# Altium PCB Q24brakelightpcb.PcbDoc
Units mil, origin at the board's own origin, x right, y up, seen from the top; angles counter-clockwise.
Board outline 6000 x 4000 mil, 2 copper layers (Top Layer, Bottom Layer); 25 components, 14 nets, 50 pads, 12 vias.
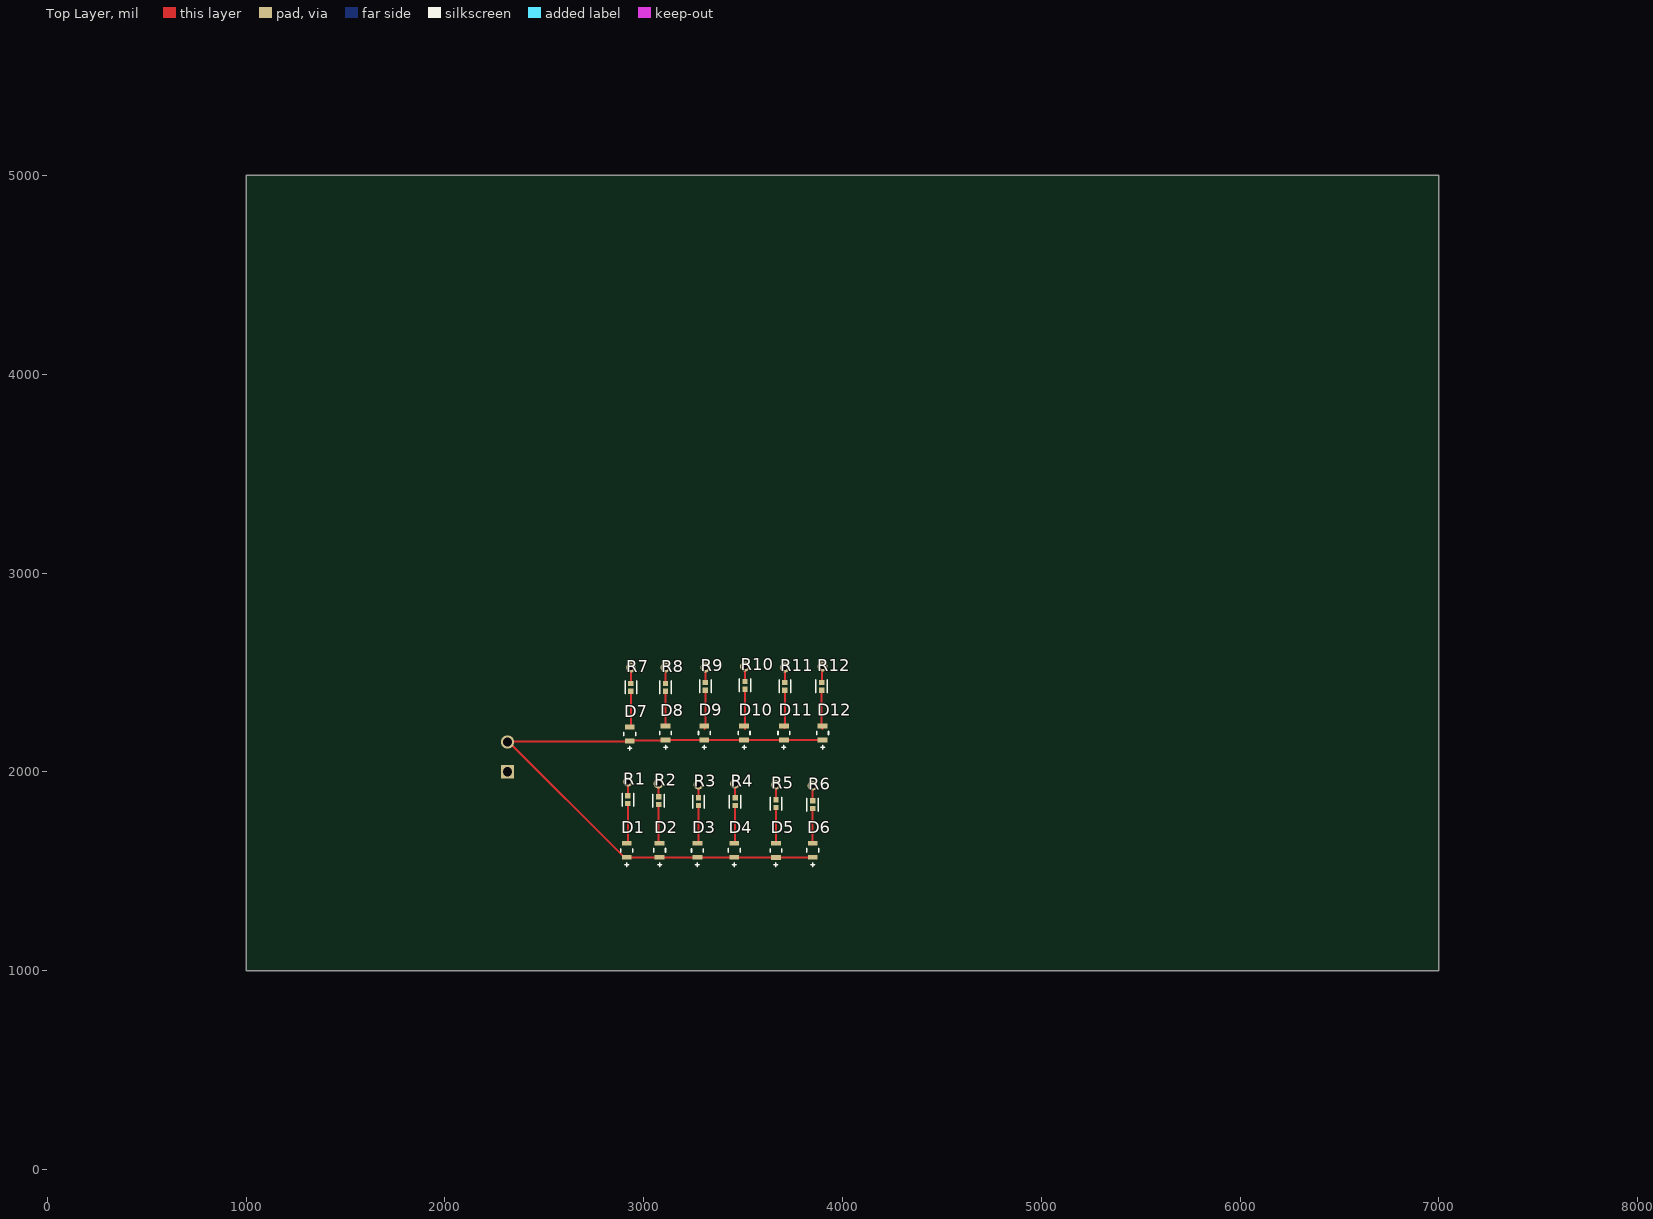
[diagram p0: Top Layer view]
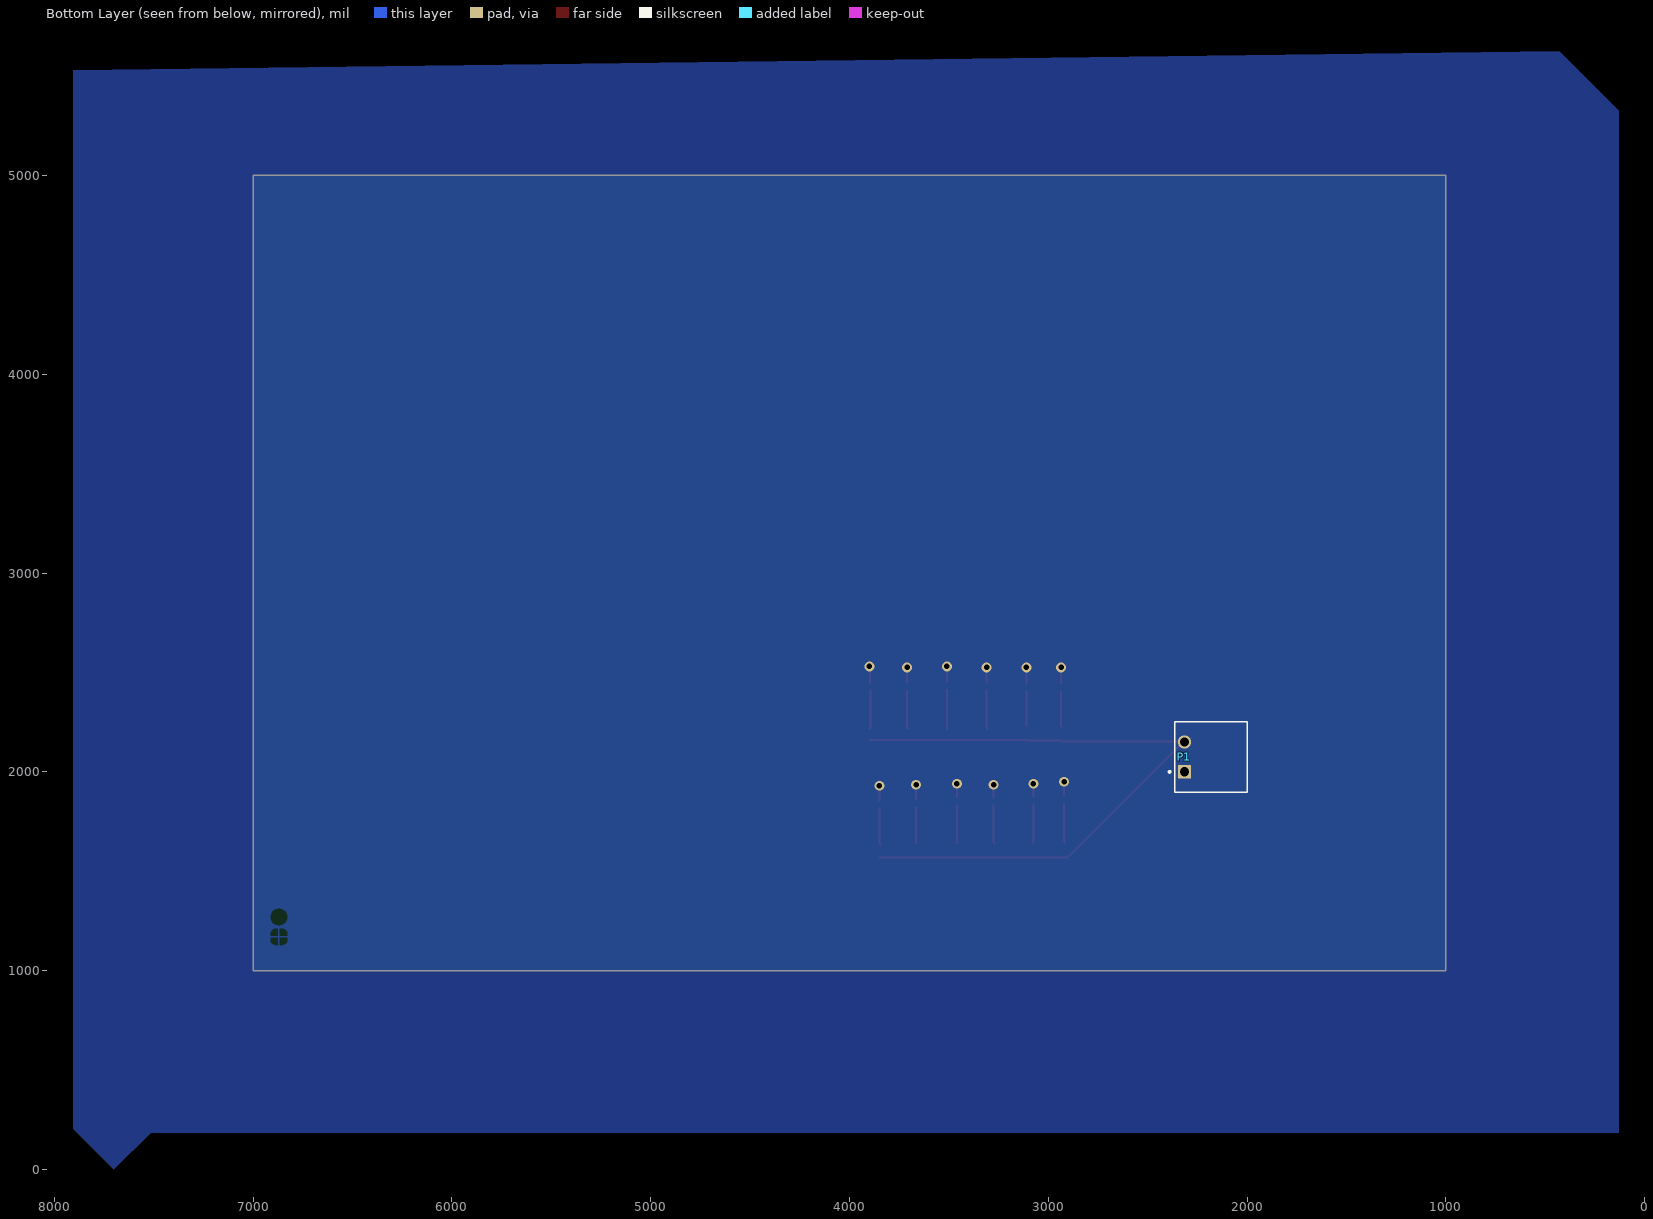
[diagram p1: Bottom Layer view, seen from below]
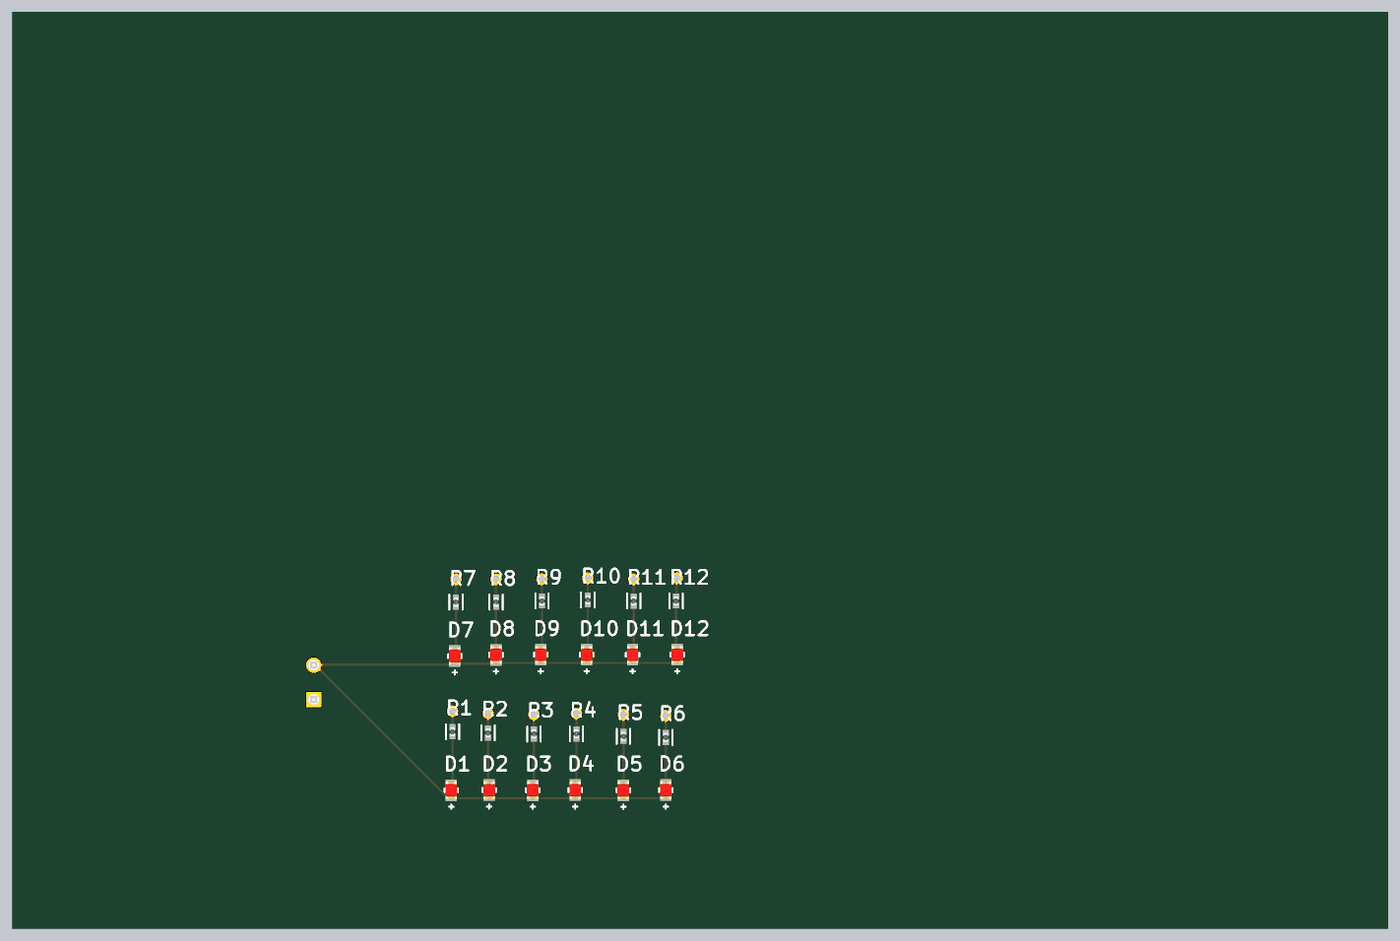
[diagram p2: 3D render of the assembled board from above, using the file's embedded part models]

## Layer stack, top to bottom
Top Solder: solder mask 0.4, Solder Resist, Dk 3.5
Top Layer: signal copper 1.4
Dielectric 1: dielectric 12.6, FR-4, Dk 4.8
Bottom Layer: signal copper 1.4
Bottom Solder: solder mask 0.4, Solder Resist, Dk 3.5

## Board outline
1000,1000 7000,1000 7000,5000 1000,5000

## Design rules (kind name [scope] priority, off if disabled: settings)
Clearance [All] p1: gap=10 ignorepadtopadclearanceinfootprint=FALSE except(0: Arc-Hole Track-Hole SMDPad-Hole THPad-Hole Via-Hole Fill-Hole Poly-Hole Region-Hole Text-Hole)
PolygonConnect [All] p1: connectstyle=Relief reliefconductorwidth=10 reliefentries=4 polygonreliefangle="90 Angle" airgapwidth=10
RoutingVias [All] p1: holewidth=28 width=50 viastyle="Through Hole" minholewidth=28 minwidth=50 maxholewidth=28 maxwidth=50
SolderMaskExpansion [All] p1: expansion=4 istentingtop=FALSE
Width [All] p1: maxlimit=10 minlimit=10 preferedwidth=10
30 further rules are at their usual default settings.

## Components (designator, comment, footprint, x,y, rotation, side; value= is the part's Value field where it differs from the comment)
D1 "SML-LX0805SRC-TR" FP-SML-LX0805SRC-TR-MFG 2915,1605 r90 top
D2 "SML-LX0805SRC-TR" FP-SML-LX0805SRC-TR-MFG 3080,1605.43 r90 top
D3 "SML-LX0805SRC-TR" FP-SML-LX0805SRC-TR-MFG 3270,1605 r90 top
D4 "SML-LX0805SRC-TR" FP-SML-LX0805SRC-TR-MFG 3455,1605.43 r90 top
D5 "SML-LX0805SRC-TR" FP-SML-LX0805SRC-TR-MFG 3665,1604.57 r90 top
D6 "SML-LX0805SRC-TR" FP-SML-LX0805SRC-TR-MFG 3850,1605.43 r90 top
D7 "SML-LX0805SRC-TR" FP-SML-LX0805SRC-TR-MFG 2930,2190 r90 top
D8 "SML-LX0805SRC-TR" FP-SML-LX0805SRC-TR-MFG 3110,2195 r90 top
D9 "SML-LX0805SRC-TR" FP-SML-LX0805SRC-TR-MFG 3305,2195.43 r90 top
D10 "SML-LX0805SRC-TR" FP-SML-LX0805SRC-TR-MFG 3505,2195.43 r90 top
D11 "SML-LX0805SRC-TR" FP-SML-LX0805SRC-TR-MFG 3705,2195.43 r90 top
D12 "SML-LX0805SRC-TR" FP-SML-LX0805SRC-TR-MFG 3900,2195.43 r90 top
P1 "1803277" PHOE-1803277_V 2315,2075 r90 bottom
R1 "ERJ-2RKF1500X" FP-ERJ2RK-IPC_A 2920,1860 r90 top
R2 "ERJ-2RKF1500X" FP-ERJ2RK-IPC_A 3075,1854.77 r90 top
R3 "ERJ-2RKF1500X" FP-ERJ2RK-IPC_A 3275,1850 r90 top
R4 "ERJ-2RKF1500X" FP-ERJ2RK-IPC_A 3460,1850.23 r90 top
R5 "ERJ-2RKF1500X" FP-ERJ2RK-IPC_A 3665,1839.77 r90 top
R6 "ERJ-2RKF1500X" FP-ERJ2RK-IPC_A 3850,1835 r90 top
R7 "ERJ-2RKF1500X" FP-ERJ2RK-IPC_A 2935,2425 r90 top
R8 "ERJ-2RKF1500X" FP-ERJ2RK-IPC_A 3110,2425 r90 top
R9 "ERJ-2RKF1500X" FP-ERJ2RK-IPC_A 3310,2430 r90 top
R10 "ERJ-2RKF1500X" FP-ERJ2RK-IPC_A 3510,2434.77 r90 top
R11 "ERJ-2RKF1500X" FP-ERJ2RK-IPC_A 3710,2429.77 r90 top
R12 "ERJ-2RKF1500X" FP-ERJ2RK-IPC_A 3895,2430 r90 top

## Footprints (in the part's own frame and the unit in brackets; to place one, negate y for a bottom-side part, rotate by r counter-clockwise, add the part's x,y. Pads: shape width x height; smd on the part's side, far side on the other; paste and mask are expansions set on the pad)
FP-ERJ2RK-IPC_A [mil]
  rect 26.31x26.48 smd paste+0 mask+0: 1(-19.77,0) 2(19.77,0)
  silkscreen extent -33,-29 33,29, body extent -41,-21 41,21, height 10
FP-SML-LX0805SRC-TR-MFG [mm]
  rect 0.6x1.25 smd paste+0 mask+0: 1(-0.9,0) 2(0.9,0)
  silkscreen extent -2.07,-0.75 0.22,0.75, body extent -1.3,-0.85 1.3,0.85, height 0.25
PHOE-1803277_V [mm] "CONN, Body 9.2x9.01mm, Pitch 3.81mm"
  rect 1.7x1.7 hole 1.2: 1(-1.905,0)
  round 1.7 hole 1.2: 2(1.905,0)
  silkscreen extent -4.5,-8 4.5,2.02, body extent -4.51,-8 4.5,1.29, height 7.25

## Part data
D1 D2 D3 D4 D5 D6 D7 D8 D9 D10 D11 D12: library part CMP-57192-000013-1, "LED RED CLEAR SMD", Case Code (Imperial)=0805, Case Code (Metric)=2012, Color=Red, Current Rating=25mA, Forward Current=20mA, Forward Voltage=1.7V, Lens Color=Colorless, Max Operating Temperature=85°C, Min Operating Temperature=-40°C, Package Quantity=3000, Power Rating=100mW, Approvals=UL, Case/Package=0805, Dominant Wavelength=660nm, Height=1.2mm, Illumination Color=Red, Lead Free="Lead Free", Length=2mm, Lens Style=Clear, Lens Transparency=Clear, Luminous Intensity=25mcd, Mount="Surface Mount", Number of LEDs=1, Number of Pins=2, Packaging="Tape and Reel", RoHS Compliant=Yes, Series=-, Test Current=20mA, Viewing Angle=140°, Voltage Rating=1.7V, Voltage Rating (DC)=1.7V, Wavelength=660nm, Width=1.25mm
P1: library part CMP-002-00014-2, "Male Header, Pitch 3.81 mm, 1 x 2 Position, Height 7.25 mm, Tail Length 3.4 mm, RoHS, Bulk", Colour=Green, Current Rating=8A, Manufacturer="Phoenix Contact", Package Description="Male Header, Pitch 3.81 mm, 1 x 2 Position, Height 7.25 mm, Tail Length 3.4 mm", Package Quantity=50, Voltage Rating=160V, Case/Package=1803277, Connector Type=Header, Contact Plating=Tin, Datasheet URL=https://datasheet.ciiva.com/16096/1803277-16096845.pdf, Datasheet Version=Feb-14, Diameter=7.25mm, Gender=Male, Lead Pitch=0.15inch, Manufacturer URL=http://www.phoenixcontact.com/, Max Current Rating=8A, Mounting Technology=TH, Package Reference=1803277, Packaging=Bulk, Pins=2, RoHS Compliant=True, Rows=1
R1 R2 R3 R4 R5 R6 R7 R8 R9 R10 R11 R12: library part CMP-1011-00415-3, "RES SMD 150 OHM 1% 1/10W 0402", Case Code (Imperial)=0402, Case Code (Metric)=1005, Max Operating Temperature=155°C, Max Power Dissipation=100mW, Min Operating Temperature=-55°C, Package Quantity=1, Resistance=150R, Resistance Tolerance=1%, Resistor Type="Thick Film", Temperature Coefficient=100ppm/°C, Voltage Rating=50V, Case/Package=0402, Construction=Rectangular, Contact Plating=Tin, Depth=0.5mm, Features="Automotive AEC-Q200", Height=0.35mm, Lead Free="Lead Free", Length=1mm, Military Standard=Not, Mount="Surface Mount", Number of Pins=2, Number of Terminations=2, Packaging="Tape and Reel", Power Rating=100mW, Radiation Hardening=No, REACH SVHC="No SVHC", RoHS Compliant=Yes, Series=ERJ, Size Code=0402, Technology="THICK FILM", Termination=SMD/SMT, Tolerance=1%, Voltage Rating (DC)=50V, Width=0.02inch

## Via types
v1: diameter 50, hole 28, Top Layer to Bottom Layer, 12 vias

## Nets (pads, with @x,y where several pads share a name; then routed paths per layer and width w, separated by ;. In a path a pad name is that pad's centre, name@x,y a point inside that pad or via, vN(x,y) a via of type N, cw(c..) or ccw(c..) an arc to the next point about the centre after c; other vN are vias at no path point)
+5: D1.1 D2.1 D3.1 D4.1 D5.1 D6.1 D7.1 D8.1 D9.1 D10.1 D11.1 D12.1 P1.2 | length 3365.8
  Top Layer w10: D6.1 3849.57,1569.57 3665.43,1569.57 D5.1 3664.57,1569.57 3455.43,1569.57 D4.1 3454.78,1569.78 3270.22,1569.78 D3.1 3269.78,1569.78 3080.22,1569.78 D2.1 3079.78,1569.78 2915.22,1569.78 D1.1 2902.2,1569.57 2321.77,2150 P1.2 2317.28,2152.28 2927.72,2152.28 D7.1 2932.5,2157.07 3107.5,2157.07 D8.1 3110.22,2159.78 3304.78,2159.78 D9.1 D10.1 D11.1 D12.1
GND: P1.1 R1.2 R2.2 R3.2 R4.2 R5.2 R6.2 R7.2 R8.2 R9.2 R10.2 R11.2 R12.2 | length 890.5
  Top Layer w10: R1.2 v1(2920,1950) ; R7.2 v1(2935,2525) ; R2.2 v1(3075,1940) ; R8.2 v1(3110,2525) ; R3.2 v1(3275,1935) ; R9.2 v1(3310,2525) ; R4.2 v1(3460,1940) ; R10.2 v1(3510,2530) ; R5.2 v1(3665,1935) ; R11.2 v1(3710,2525) ; R6.2 v1(3850,1930) ; R12.2 3897.5,2452.27 3897.5,2527.5 v1(3900,2530)
NetD1_2: D1.2 R1.1 | length 197.3
  Top Layer w10: D1.2@2915,1645 2920,1650 R1.1
NetD2_2: D2.2 R2.1 | length 196.2
  Top Layer w10: R2.1 3075,1645.87 D2.2
NetD3_2: D3.2 R3.1 | length 191.9
  Top Layer w10: D3.2 3275,1645.43 R3.1
NetD4_2: D4.2 R4.1 | length 191.7
  Top Layer w10: D4.2 3460,1645.87 R4.1
NetD5_2: D5.2 R5.1 | length 180
  Top Layer w10: D5.2 R5.1
NetD6_2: D6.2 R6.1 | length 181.9
  Top Layer w10: D6.2@3845,1635.43 3850,1640.43 R6.1
NetD7_2: D7.2 R7.1 | length 181.9
  Top Layer w10: D7.2 2935,2230.43 R7.1
NetD8_2: D8.2 R8.1 | length 174.8
  Top Layer w10: D8.2 R8.1
NetD9_2: D9.2 R9.1 | length 366.7
  Top Layer w10: 3305,2215 3310,2220 R9.1@3310,2405.23 ; D9.2@3310,2235.87 R9.1
NetD10_2: D10.2 R10.1 | length 199.6
  Top Layer w10: 3510,2215.43 R10.1
NetD11_2: D11.2 R11.1 | length 196.6
  Top Layer w10: D11.2@3705,2220.43 D11.2@3710,2225.43 ; D11.2@3710,2220.43 R11.1
NetD12_2: D12.2 R12.1 | length 196.9
  Top Layer w10: R12.1 3895,2220.43 3900,2215.43

## Polygon pours and split planes (outlines as drawn)
GND on Bottom Layer "GND_L02_P000" (solid, pour order 0): 7915,5530 7905,5540 7905,205 7700,0 7515,185 130,185 130,5325 430,5625